# EAGLE board arm_pcb2020 (EAGLE 9.6.2)
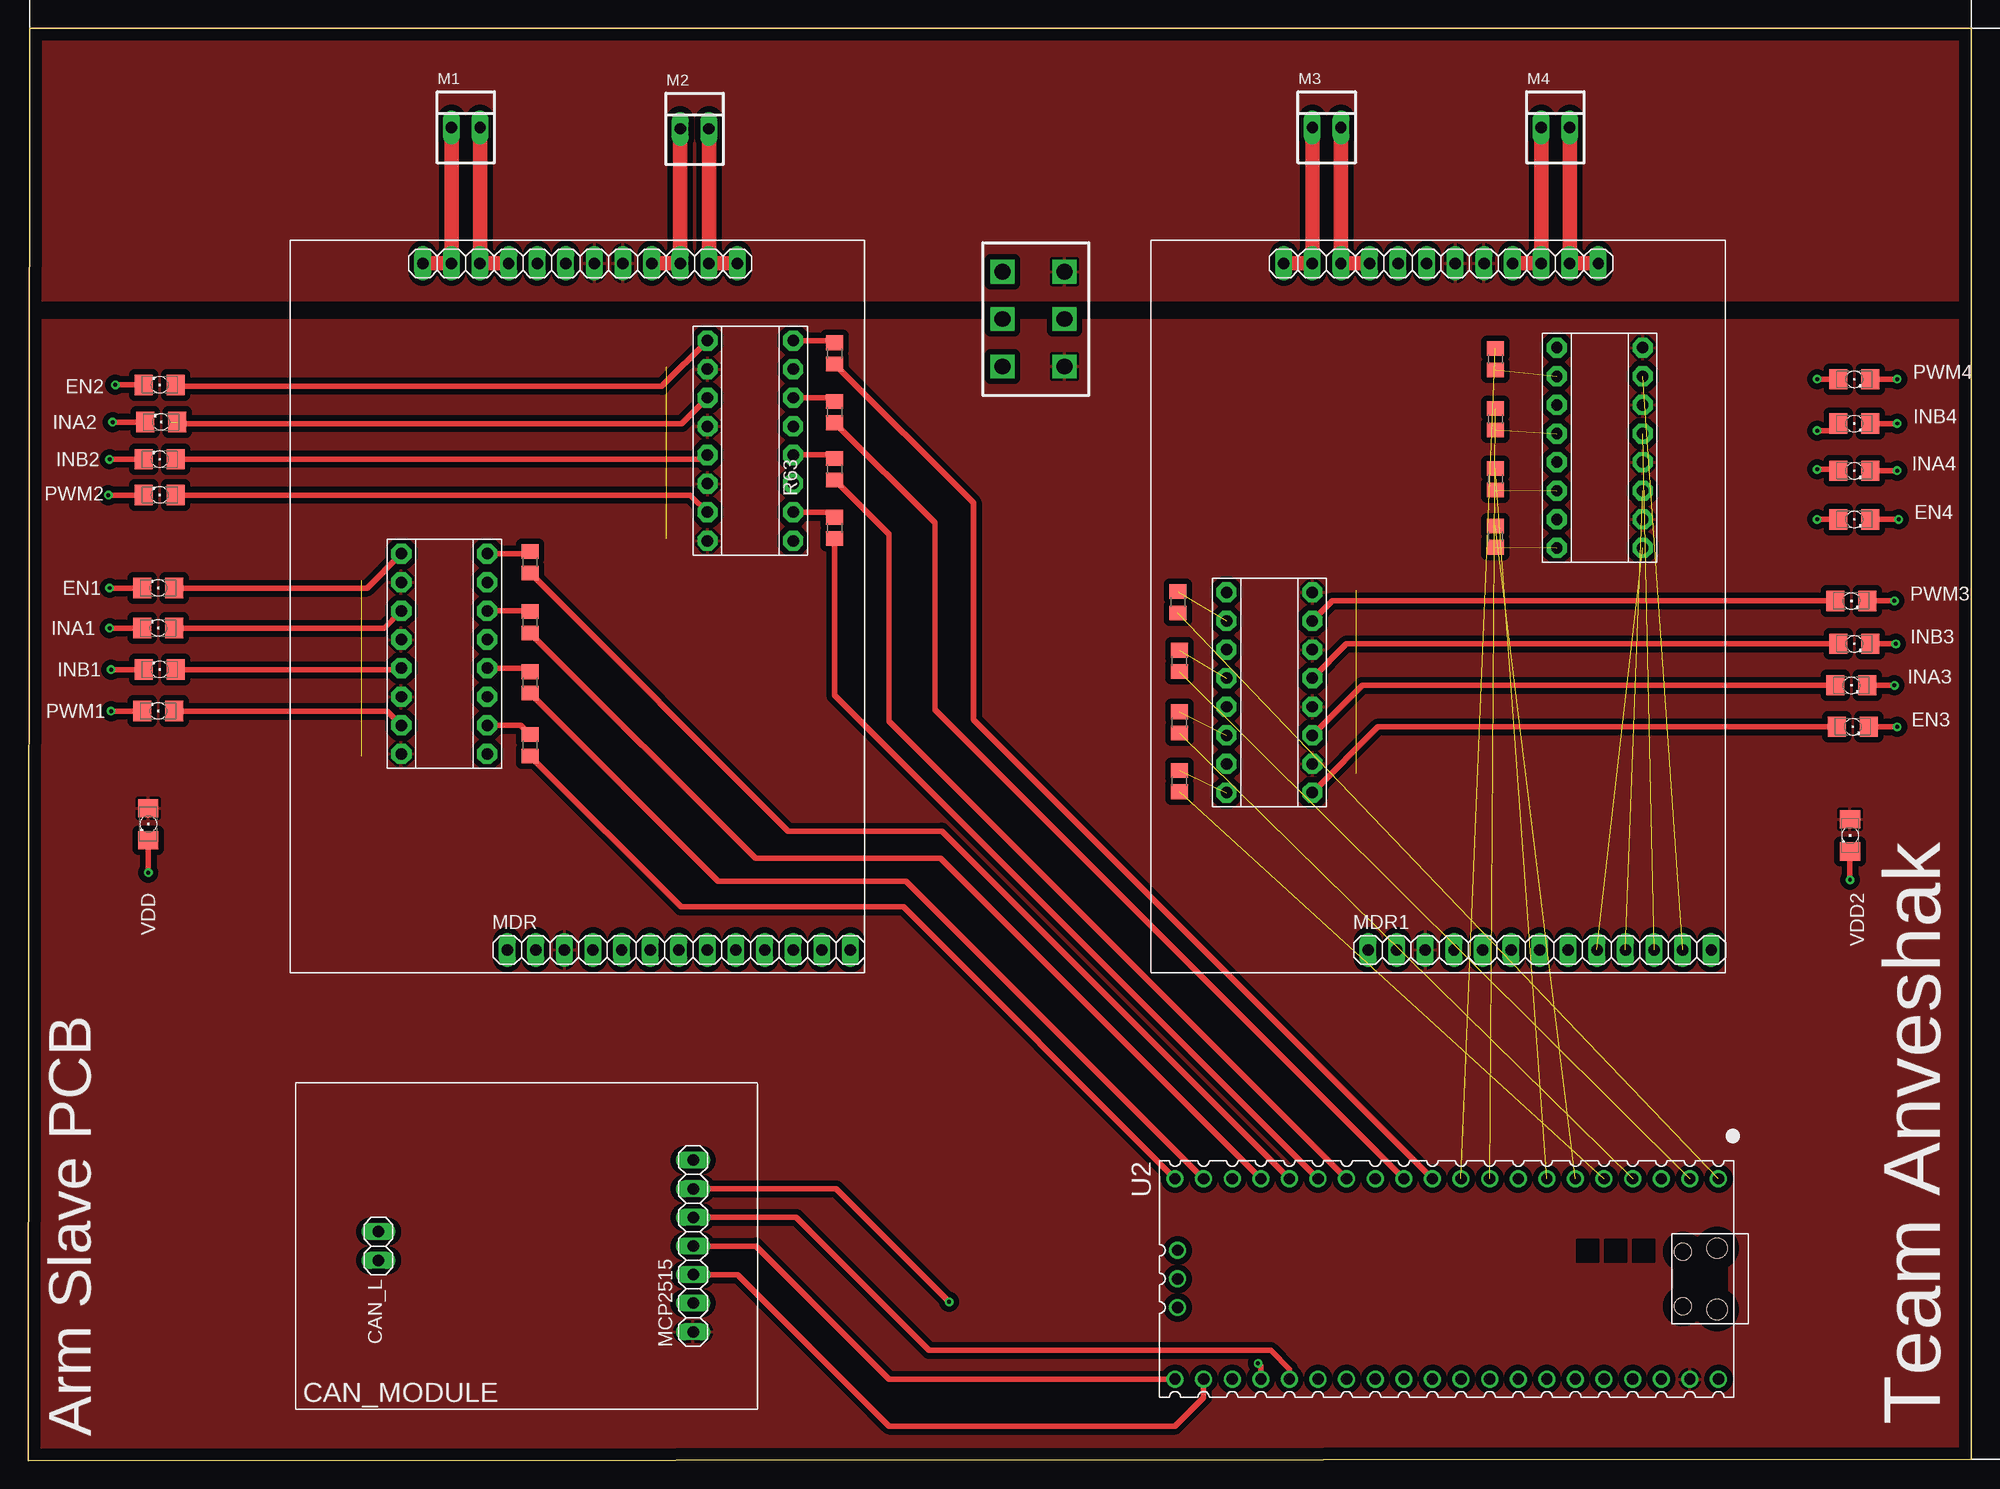
[diagram p0: board, top side]
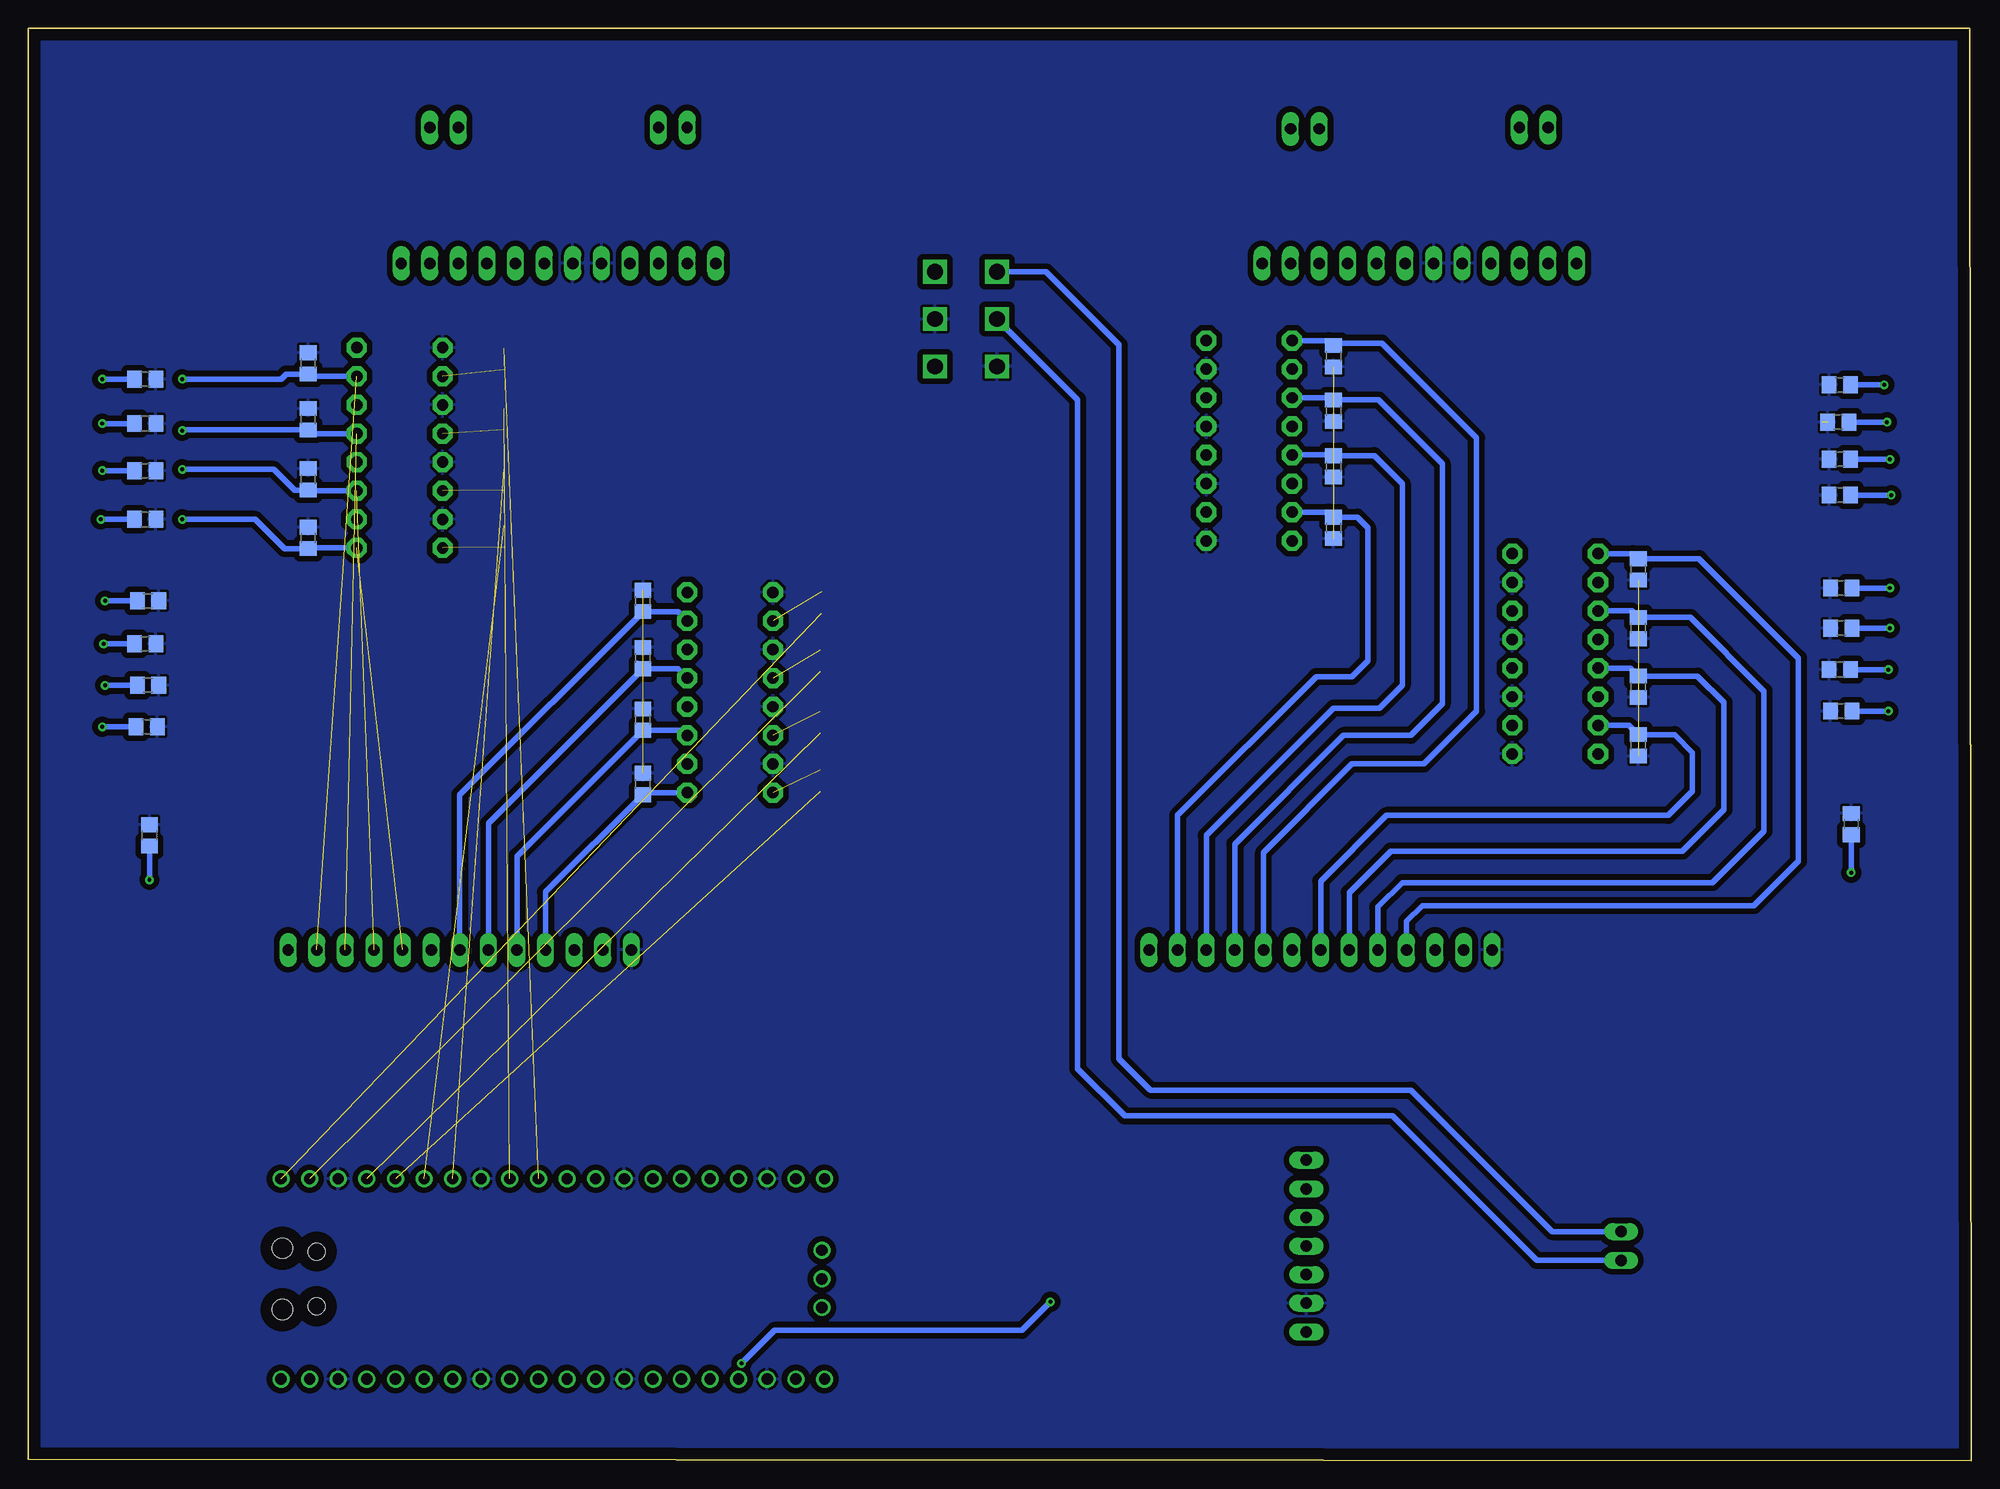
[diagram p1: board, bottom side, seen from below]

Size 172.57 x 127.18 mm. Coordinates in mm from the lower left corner, seen from the top.
Outline: 0,0 172.57,0.13 172.57,127.18 0.13,127.18 0,0
Copper layers (1*16): Top 0.035mm / dielectric 1.5mm / Bottom 0.035mm
Design rules "default *": minimum track width 6mil, minimum drill 0.35mm, track to track 20mil, track to pad 20mil, pad to pad 20mil, via to via 20mil, smd to smd 20mil, copper to edge 40mil, drill to drill 6mil, minimum pad ring 10mil, minimum via ring 8mil, stop-mask expansion 4mil, vias tented up to drill 0mil, thermal gap 10mil
Net classes: 0 default: width 0.508 mm, clearance 0.508 mm

## Footprints (pad centres in the part's own frame; a part is rotated, then mirrored left to right if it is on the bottom)
1X02 = drill 1.016 long: 1 -1.27,0; 2 1.27,0
1206 = smd 1.6 x 1.803: A -1.422,0; C 1.422,0
1X08-BIG = drill 1.016 pad 1.778 octagon: 1 -8.89,0; 2 -6.35,0; 3 -3.81,0; 4 -1.27,0; 5 1.27,0; 6 3.81,0; 7 6.35,0; 8 8.89,0
22-23-2021 = drill 1 long: 1 -1.27,0; 2 1.27,0
1X07 = drill 1.016 long: 1 -7.62,0; 2 -5.08,0; 3 -2.54,0; 4 0,0; 5 2.54,0; 6 5.08,0; 7 7.62,0
1X12 = drill 1.016 long: 1 -13.97,0; 2 -11.43,0; 3 -8.89,0; 4 -6.35,0; 5 -3.81,0; 6 -1.27,0; 7 1.27,0; 8 3.81,0; 9 6.35,0; 10 8.89,0; 11 11.43,0; 12 13.97,0
1X13 = drill 1.016 long: 1 -15.24,0; 2 -12.7,0; 3 -10.16,0; 4 -7.62,0; 5 -5.08,0; 6 -2.54,0; 7 0,0; 8 2.54,0; 9 5.08,0; 10 7.62,0; 11 10.16,0; 12 12.7,0; 13 15.24,0
5566-6 = drill 1.4 square: 1 4.2,-2.75; 2 0,-2.75; 3 -4.2,-2.75; 4 4.2,2.75; 5 0,2.75; 6 -4.2,2.75
R0805 = smd 1.3 x 1.5: 1 -0.95,0; 2 0.95,0
PICO-PKG-TH = drill 1: 1 -8.89,24.13; 2 -8.89,21.59; 3 -8.89,19.05; 4 -8.89,16.51; 5 -8.89,13.97; 6 -8.89,11.43; 7 -8.89,8.89; 8 -8.89,6.35; 9 -8.89,3.81; 10 -8.89,1.27; 11 -8.89,-1.27; 12 -8.89,-3.81; 13 -8.89,-6.35; 14 -8.89,-8.89; 15 -8.89,-11.43; 16 -8.89,-13.97; 17 -8.89,-16.51; 18 -8.89,-19.05; 19 -8.89,-21.59; 20 -8.89,-24.13; 21 8.89,-24.13; 22 8.89,-21.59; 23 8.89,-19.05; 24 8.89,-16.51; 25 8.89,-13.97; 26 8.89,-11.43; 27 8.89,-8.89; 28 8.89,-6.35; 29 8.89,-3.81; 30 8.89,-1.27; 31 8.89,1.27; 32 8.89,3.81; 33 8.89,6.35; 34 8.89,8.89; 35 8.89,11.43; 36 8.89,13.97; 37 8.89,16.51; 38 8.89,19.05; 39 8.89,21.59; 40 8.89,24.13; 41 -2.54,-23.9; 42 0,-23.9; 43 2.54,-23.9 | hole 1.8: -2.725,24; 2.725,24 | hole 1.5: -2.425,20.97; 2.425,20.97

## Placement (x,y rotation side)
CAN_L  CAN_H  [1X02]  31.11,19.05 90 top
EN1  [1206]  11.56,77.47 180 top
EN2  [1206]  11.68,95.5 180 top
EN3  [1206]  162.05,65.15 0 top
EN4  [1206]  162.18,83.57 0 top
INA1  [1206]  11.56,73.91 180 top
INA2  [1206]  11.81,92.2 180 top
INA3  [1206]  161.92,68.83 0 top
INA4  [1206]  162.18,87.88 0 top
INB1  [1206]  11.68,70.23 180 top
INB2  [1206]  11.68,88.9 180 top
INB3  [1206]  162.18,72.52 0 top
INB4  [1206]  162.18,92.08 0 top
JP1  [1X08-BIG]  40.77,71.63 270 top
JP2  [1X08-BIG]  33.15,71.63 270 top
JP3  [1X08-BIG]  106.43,68.2 90 top
JP4  [1X08-BIG]  114.05,68.2 90 top
JP5  [1X08-BIG]  67.95,90.55 270 top
JP6  [1X08-BIG]  60.33,90.55 270 top
JP7  [1X08-BIG]  135.76,89.92 90 top
JP8  [1X08-BIG]  143.38,89.92 90 top
M1  22-23-2021  [22-23-2021]  38.86,118.36 0 top
M2  22-23-2021  [22-23-2021]  59.18,118.24 0 top
M3  22-23-2021  [22-23-2021]  115.32,118.36 0 top
M4  22-23-2021  [22-23-2021]  135.64,118.36 0 top
MCP2515  [1X07]  59.05,19.05 90 top
MDL  MDL12  [1X12]  49.02,106.3 0 top
MDL1  MDL34  [1X12]  125.48,106.3 0 top
MDR  MDR12  [1X13]  57.78,45.34 0 top
MDR1  MDR34  [1X13]  134.24,45.34 0 top
PL2  [5566-6]  89.28,101.35 90 top
PWM1  [1206]  11.56,66.55 180 top
PWM2  [1206]  11.68,85.73 180 top
PWM3  [1206]  161.92,76.33 0 top
PWM4  [1206]  162.18,96.01 0 top
R1  [R0805]  117.98,65.79 270 bottom
R2  [R0805]  117.98,76.33 270 bottom
R3  [R0805]  29.59,63.5 90 bottom
R4  [R0805]  29.59,73.91 90 bottom
R5  [R0805]  56.64,82.8 90 bottom
R6  [R0805]  56.64,93.22 90 bottom
R7  [R0805]  147.7,97.41 270 bottom
R8  [R0805]  147.7,87.12 270 bottom
R9  [R0805]  29.59,68.71 90 bottom
R11  [R0805]  29.59,79.12 90 bottom
R14  [R0805]  10.67,56.52 90 bottom
R15  [R0805]  11.56,73.91 180 bottom
R16  [R0805]  11.81,92.2 180 bottom
R17  [R0805]  11.68,70.23 180 bottom
R18  [R0805]  11.68,88.9 180 bottom
R19  [R0805]  11.56,66.55 180 bottom
R20  [R0805]  11.68,85.73 180 bottom
R33  [R0805]  11.56,77.47 180 bottom
R34  [R0805]  11.68,95.5 180 bottom
R46  [R0805]  161.8,55.5 90 bottom
R47  [R0805]  161.92,68.83 0 bottom
R48  [R0805]  162.18,87.88 0 bottom
R49  [R0805]  162.18,72.52 0 bottom
R50  [R0805]  162.18,92.08 0 bottom
R51  [R0805]  161.92,76.33 0 bottom
R52  [R0805]  162.18,96.01 0 bottom
R53  [R0805]  162.05,65.15 0 bottom
R54  [R0805]  162.18,83.57 0 bottom
R56  [R0805]  56.64,88.27 90 bottom
R58  [R0805]  56.64,98.04 90 bottom
R59  [R0805]  44.58,79.76 270 top
R60  [R0805]  44.58,74.42 270 top
R61  [R0805]  44.58,69.09 270 top
R62  [R0805]  44.58,63.5 270 top
R63  [R0805]  71.63,98.3 270 top
R64  [R0805]  71.63,93.09 270 top
R65  [R0805]  71.63,88.01 270 top
R66  [R0805]  71.63,82.8 270 top
R68  [R0805]  117.98,71.25 270 bottom
R70  [R0805]  117.98,60.07 270 bottom
R72  [R0805]  147.7,92.46 270 bottom
R74  [R0805]  147.7,81.92 270 bottom
R75  [R0805]  102.23,60.33 270 top
R76  [R0805]  102.23,65.53 270 top
R77  [R0805]  102.23,70.99 270 top
R78  [R0805]  102.11,76.2 270 top
R79  [R0805]  130.3,82.04 90 top
R80  [R0805]  130.3,87.12 90 top
R81  [R0805]  130.3,92.46 90 top
R82  [R0805]  130.3,97.79 90 top
U2  RASPBERRY_PICOTH  [PICO-PKG-TH]  125.98,16.13 270 top
VDD  [1206]  10.67,56.52 270 top
VDD2  [1206]  161.8,55.5 270 top

## Library data of the parts
CAN_L MCP2515 = pinhead
EN1-EN4 INA1-INA4 INB1-INB4 PWM1-PWM4 VDD VDD2 = led
JP1-JP8 MDL MDL1 MDR MDR1 = adafruit
M1-M4 = con-molex; MF: MOLEX; MPN: 22-23-2021; OC_FARNELL: 1462926; OC_NEWARK: 25C3832
PL2 = anv-molex
R1-R9 R11 R14-R20 R33 R34 R46-R54 R56 R58-R66 R68 R70 R72 R74-R82 = rcl; SPICEPREFIX: R
U2 = RpiPico

## Nets
3.3V: U2.36
12V: MDL1.7 MDL1.8 MDL.7 MDL.8 PL2.1
CAN-H: CAN_L.2 PL2.4
CAN-L: CAN_L.1 PL2.5
DEN1: EN1.A JP2.1 MDR.4 R11.2
DEN2: EN2.A JP6.1 MDR.9 R58.2
DEN3: EN3.A JP4.1 MDR1.4 R70.2
DEN4: EN4.A JP8.1 MDR1.9 R74.2
DINA1: INA1.A JP2.3 MDR.5 R4.2
DINA2: INA2.A JP6.3 MDR.10 R6.2
DINA3: INA3.A JP4.3 MDR1.5 R1.2
DINA4: INA4.A JP8.3 MDR1.10 R8.2
DINB1: INB1.A JP2.5 MDR.6 R9.2
DINB2: INB2.A JP6.5 MDR.11 R56.2
DINB3: INB3.A JP4.5 MDR1.6 R68.2
DINB4: INB4.A JP8.5 MDR1.11 R72.2
DPWM1: JP2.7 MDR.7 PWM1.A R3.2
DPWM2: JP6.7 MDR.12 PWM2.A R5.2
DPWM3: JP4.7 MDR1.7 PWM3.A R2.2
DPWM4: JP8.7 MDR1.12 PWM4.A R7.2
EN1: R62.2 U2.20
EN2: R66.2 U2.15
EN3: R78.2 U2.1
EN4: R82.2 U2.10
GND: JP1.2 JP1.4 JP1.6 JP1.8 JP3.2 JP3.4 JP3.6 JP3.8 JP5.2 JP5.4 JP5.6 JP5.8 JP7.2 JP7.4 JP7.6 JP7.8 MCP2515.2 MDL1.5 MDL1.6 MDL.5 MDL.6 MDR1.1 MDR.1 PL2.2 PL2.6 R1.1 R2.1 R3.1 R4.1 R5.1 R6.1 R7.1 R8.1 R9.1 R11.1 R14.2 R15.2 R16.2 R17.2 R18.2 R19.2 R20.2 R33.2 R34.2 R46.2 R47.2 R48.2 R49.2 R50.2 R51.2 R52.2 R53.2 R54.2 R56.1 R58.1 R68.1 R70.1 R72.1 R74.1 U2.3 U2.8 U2.13 U2.18 U2.23 U2.28 U2.33 U2.38
INA1: R61.2 U2.19
INA2: R65.2 U2.14
INA3: R77.2 U2.2
INA4: R81.2 U2.9
INB1: R60.2 U2.17
INB2: R64.2 U2.12
INB3: R76.2 U2.4
INB4: R80.2 U2.7
M1A: M1.1 MDL.1 MDL.2
M1B: M1.2 MDL.3 MDL.4
M2A: M2.1 MDL.9 MDL.10
M2B: M2.2 MDL.11 MDL.12
M3A: M3.1 MDL1.1 MDL1.2
M3B: M3.2 MDL1.3 MDL1.4
M4A: M4.1 MDL1.9 MDL1.10
M4B: M4.2 MDL1.11 MDL1.12
MISO: MCP2515.4 U2.21
MOSI: MCP2515.5 U2.25
N$4: R46.1 VDD2.C
N$5: INA1.C R15.1
N$8: INA2.C R16.1
N$14: INB1.C R17.1
N$17: R14.1 VDD.C
N$18: INB2.C R18.1
N$19: PWM1.C R19.1
N$20: PWM2.C R20.1
N$21: EN1.C R33.1
N$24: EN2.C R34.1
N$25: INA3.C R47.1
N$26: INA4.C R48.1
N$27: INB3.C R49.1
N$28: MDR.2
N$29: INB4.C R50.1
N$30: MCP2515.7
N$31: PWM3.C R51.1
N$32: PWM4.C R52.1
N$33: EN3.C R53.1
N$34: MDR.8
N$35: EN4.C R54.1
N$36: MDR1.2
N$39: MDR.13
N$46: JP1.1 R59.1
N$51: JP1.3 R60.1
N$52: JP1.5 R61.1
N$53: JP1.7 R62.1
N$54: JP5.1 R63.1
N$55: JP5.3 R64.1
N$56: JP5.5 R65.1
N$57: JP5.7 R66.1
N$72: JP3.1 R75.1
N$73: JP3.3 R76.1
N$74: JP3.5 R77.1
N$75: JP3.7 R78.1
N$76: JP7.1 R79.1
N$77: JP7.3 R80.1
N$78: JP7.5 R81.1
N$79: JP7.7 R82.1
PWM1: R59.2 U2.16
PWM2: R63.2 U2.11
PWM3: R75.2 U2.5
PWM4: R79.2 U2.6
SCK: MCP2515.6 U2.24
SS: MCP2515.3 U2.22
SWGND: U2.42
VBUS: U2.40
VDD: JP2.2 JP2.4 JP2.6 JP2.8 JP4.2 JP4.4 JP4.6 JP4.8 JP6.2 JP6.4 JP6.6 JP6.8 JP8.2 JP8.4 JP8.6 JP8.8 MCP2515.1 MDR1.3 MDR.3 PL2.3 U2.39 VDD2.A VDD.A

## Tracks (layer width: path | path; a pad name or v marks a point on that pad's centre or on a via)
12V
  pour Top: -0.76,103 173.48,103 173.48,131.44 -0.76,131.44
CAN-H
  Bottom 0.508: PL2.4 82.18,105.55 75.69,99.06 75.69,35.69 72.9,32.89 49.78,32.89 37.21,20.32 CAN_L.2
CAN-L
  Bottom 0.508: PL2.5 79.37,94.19 79.37,34.8 75.18,30.61 51.43,30.61 38.61,17.78 CAN_L.1
DEN1
  Top 0.508: JP2.1 30.1,77.47 EN1.A
  Bottom 0.508: JP2.1 30.04,80.52 R11.2 24.19,80.07 15.37,71.25 15.37,53.21 19.3,49.28 48.77,49.28 50.17,47.88 MDR.4
DEN2
  Top 0.508: EN2.A 13.23,95.38 56.26,95.38 JP6.1
  Bottom 0.508: JP6.1 57.09,99.44 56.86,99.22 | 56.86,99.22 R58.2 | MDR.9 62.86,53.98 54.99,61.85 48.64,61.85 43.94,66.55 43.94,90.81 52.35,99.22 56.86,99.22
DEN3
  Top 0.508: JP4.1 119.89,65.15 EN3.A
  Bottom 0.508: JP4.1 117.8,59.31 R70.2 126.62,50.48 MDR1.4
DEN4  (via drill 0.35)  (1 unrouted)
  Top 0.508: v158.88,83.57 EN4.A
  Bottom 0.508: JP8.1 147.64,81.03 R74.2 149.8,80.97 152.4,83.57 v158.88,83.57
DINA1
  Top 0.508: INA1.A 31.62,73.91 JP2.3
  Bottom 0.508: JP2.3 30.17,75.44 R4.2 24.95,74.86 18.42,68.33 18.42,55.88 22.99,51.31 50.55,51.31 52.7,49.15 MDR.5
DINA2  (1 unrouted)
  Top 0.508: 12.7,92.2 12.83,92.08 58.04,92.08 JP6.3
  Bottom 0.508: JP6.3 56.83,94.36 R6.2 52.64,94.17 46.99,88.52 46.99,67.18 49.78,64.39 55.75,64.39 65.4,54.74 MDR.10
DINA3
  Top 0.508: 160.38,68.71 INA3.A 118.49,68.83 JP4.3
  Bottom 0.508: JP4.3 114.49,64.84 R1.2 129.16,53.66 MDR1.5
DINA4  (via drill 0.35)  (1 unrouted)
  Top 0.508: v158.88,88.01 160.63,88.01 INA4.A
  Bottom 0.508: JP8.3 147.63,86.11 R8.2 148.91,86.17 150.75,88.01 v158.88,88.01
DINB1
  Top 0.508: INB1.A 33.02,70.23 JP2.5
  Bottom 0.508: JP2.5 30.29,70.36 R9.2 24.32,69.66 21.97,67.31 21.97,57.78 25.65,54.1 51.56,54.1 55.24,50.42 MDR.6
DINB2
  Top 0.508: JP6.5 59.94,88.9 INB2.A
  Bottom 0.508: JP6.5 56.71,89.28 R56.2 53.02,89.22 50.55,86.74 50.55,68.83 52.58,66.8 56.64,66.8 67.95,55.5 MDR.11
DINB3
  Top 0.508: 160.63,72.64 INB3.A 117.09,72.52 JP4.5
  Bottom 0.508: JP4.5 114.87,70.3 R68.2 | R68.2 118.47,70.78 | R68.2 131.7,56.58 MDR1.6
DINB4  (via drill 0.35)  (1 unrouted)
  Top 0.508: v158.88,91.44 160.12,91.44 INB4.A
  Bottom 0.508: v158.88,91.44 158.81,91.51 R72.2 147.38,91.19 JP8.5
DPWM1
  Top 0.508: PWM1.A 31.88,66.55 JP2.7
  Bottom 0.508: JP2.7 30.42,65.28 R3.2 26.35,64.45 24.77,62.86 24.77,59.44 26.92,57.28 51.94,57.28 57.78,51.44 MDR.7
DPWM2
  Top 0.508: PWM2.A 22.35,85.73 22.61,85.73 58.8,85.73 JP6.7
  Bottom 0.508: JP6.7 57.09,84.2 R5.2 54.54,83.75 53.59,82.8 53.59,70.99 54.99,69.6 58.17,69.6 70.48,57.28 MDR.12
DPWM3
  Top 0.508: 160.25,76.07 PWM3.A 115.82,76.33 JP4.7
  Bottom 0.508: JP4.7 114.87,75.38 R2.2 134.24,59.12 MDR1.7
DPWM4  (via drill 0.35)  (1 unrouted)
  Top 0.508: v158.88,96.01 PWM4.A
  Bottom 0.508: JP8.7 147.51,96.27 R7.2 149.67,96.46 150.11,96.01 v158.88,96.01
EN1
  Top 0.508: 44.58,62.99 R62.2 57.98,49.15 77.72,49.15 U2.20
EN2
  Top 0.508: R66.2 71.63,67.95 U2.15
EN3  (1 unrouted)
EN4  (1 unrouted)
GND  (9 unrouted)
  pour Bottom: -3.43,131.95 173.1,131.95 173.1,-4.06 -3.43,-4.06
INA1
  Top 0.508: 44.58,68.33 R61.2 61.28,51.44 77.98,51.44 U2.19
INA2
  Top 0.508: R65.2 76.45,82.23 76.45,65.66 U2.14
INA3  (1 unrouted)
INA4  (1 unrouted)
INB1
  Top 0.508: 44.64,73.47 R60.2 64.58,53.47 81.03,53.47 U2.17
INB2
  Top 0.508: R64.2 80.52,83.25 80.52,66.67 U2.12
INB3  (1 unrouted)
INB4  (1 unrouted)
M1A
  Top 1.27: M1.1 MDL.2 MDL.1
M1B
  Top 1.27: M1.2 MDL.3 MDL.4
M2A
  Top 1.27: M2.1 MDL.10 MDL.9
M2B
  Top 1.27: M2.2 MDL.11 MDL.12
M3A
  Top 1.27: M3.1 MDL1.2 MDL1.1
M3B
  Top 1.27: M3.2 MDL1.3 MDL1.4
M4A
  Top 1.27: M4.1 MDL1.10 MDL1.9
M4B
  Top 1.27: M4.2 MDL1.11 MDL1.12
MISO
  Top 0.508: MCP2515.4 64.64,19.05 76.45,7.24 U2.21
MOSI
  Top 0.508: MCP2515.5 68.2,21.59 80.01,9.78 110.36,9.78 112.01,8.13 U2.25
N$4  (via drill 0.35)
  Top 0.508: VDD2.C v161.8,51.56
  Bottom 0.508: v161.8,51.56 R46.1
N$5  (via drill 0.35)
  Top 0.508: INA1.C v7.24,73.91
  Bottom 0.508: v7.24,73.91 R15.1
N$8  (via drill 0.35)
  Top 0.508: INA2.C v7.49,92.2
  Bottom 0.508: v7.49,92.2 R16.1
N$14  (via drill 0.35)
  Top 0.508: INB1.C v7.37,70.23
  Bottom 0.508: v7.37,70.23 R17.1
N$17  (via drill 0.35)
  Top 0.508: VDD.C v10.67,52.2
  Bottom 0.508: v10.67,52.2 R14.1
N$18  (via drill 0.35)
  Top 0.508: INB2.C v7.24,88.9
  Bottom 0.508: v7.24,88.9 R18.1
N$19  (via drill 0.35)
  Top 0.508: PWM1.C v7.37,66.55
  Bottom 0.508: v7.37,66.55 R19.1
N$20  (via drill 0.35)
  Top 0.508: PWM2.C v7.11,85.73
  Bottom 0.508: v7.11,85.73 R20.1
N$21  (via drill 0.35)
  Top 0.508: EN1.C v7.24,77.47
  Bottom 0.508: v7.24,77.47 R33.1
N$24  (via drill 0.35)
  Top 0.508: EN2.C v7.75,95.5
  Bottom 0.508: v7.75,95.5 R34.1
N$25  (via drill 0.35)
  Top 0.508: INA3.C v165.73,68.83
  Bottom 0.508: v165.73,68.83 R47.1
N$26  (via drill 0.35)
  Top 0.508: INA4.C v165.99,87.88
  Bottom 0.508: v165.99,87.88 R48.1
N$27  (via drill 0.35)
  Top 0.508: INB3.C v165.86,72.52
  Bottom 0.508: v165.86,72.52 R49.1
N$29  (via drill 0.35)
  Top 0.508: INB4.C v165.99,92.08
  Bottom 0.508: v165.99,92.08 R50.1
N$31  (via drill 0.35)
  Top 0.508: PWM3.C v165.73,76.33
  Bottom 0.508: v165.73,76.33 R51.1
N$32  (via drill 0.35)
  Top 0.508: PWM4.C v165.99,96.01
  Bottom 0.508: v165.99,96.01 R52.1
N$33  (via drill 0.35)
  Top 0.508: EN3.C v165.99,65.15
  Bottom 0.508: v165.99,65.15 R53.1
N$35  (via drill 0.35)
  Top 0.508: EN4.C v166.12,83.57
  Bottom 0.508: v166.12,83.57 R54.1
N$46
  Top 0.508: JP1.1 44.39,80.52 R59.1
N$51
  Top 0.508: JP1.3 44.51,75.44 R60.1
N$52
  Top 0.508: JP1.5 44.26,70.36 R61.1
N$53
  Top 0.508: R62.1 43.75,65.28 JP1.7
N$54
  Top 0.508: JP5.1 71.43,99.44 R63.1
N$55
  Top 0.508: JP5.3 71.31,94.36 R64.1
N$56
  Top 0.508: 71.18,88.96 R65.1 71.31,89.28 JP5.5
N$57
  Top 0.508: JP5.7 71.18,84.2 R66.1
N$72  (1 unrouted)
N$73  (1 unrouted)
N$74  (1 unrouted)
N$75  (1 unrouted)
N$76  (1 unrouted)
N$77  (1 unrouted)
N$78  (1 unrouted)
N$79  (1 unrouted)
PWM1
  Top 0.508: 44.9,78.81 R59.2 67.5,55.88 81.15,55.88 U2.16
PWM2
  Top 0.508: R63.2 83.95,85.03 83.95,65.91 83.95,65.79 U2.11
PWM3  (1 unrouted)
PWM4  (1 unrouted)
SCK  (via drill 0.35)
  Top 0.508: MCP2515.6 71.76,24.13 v81.79,14.1 | v109.22,8.64 109.47,8.38 U2.24
  Bottom 0.508: v81.79,14.1 84.33,11.56 106.3,11.56 v109.22,8.64
SS
  Top 0.508: MCP2515.3 62.99,16.51 76.45,3.05 101.85,3.05 104.39,5.59 U2.22
VDD
  pour Top: -0.76,101.35 173.61,101.35 173.61,-1.9 -0.76,-1.9

## Text on the board
tPlace: CAN_MODULE | Team Anveshak | Arm Slave PCB